# Altium PCB Holder_PCB.PcbDoc
Units mil, origin at the board's own origin, x right, y up, seen from the top; angles counter-clockwise.
Board outline 2244.09 x 2244.09 mil, 2 copper layers (Top Layer, Bottom Layer); 17 components, 13 nets, 72 pads, 0 vias.
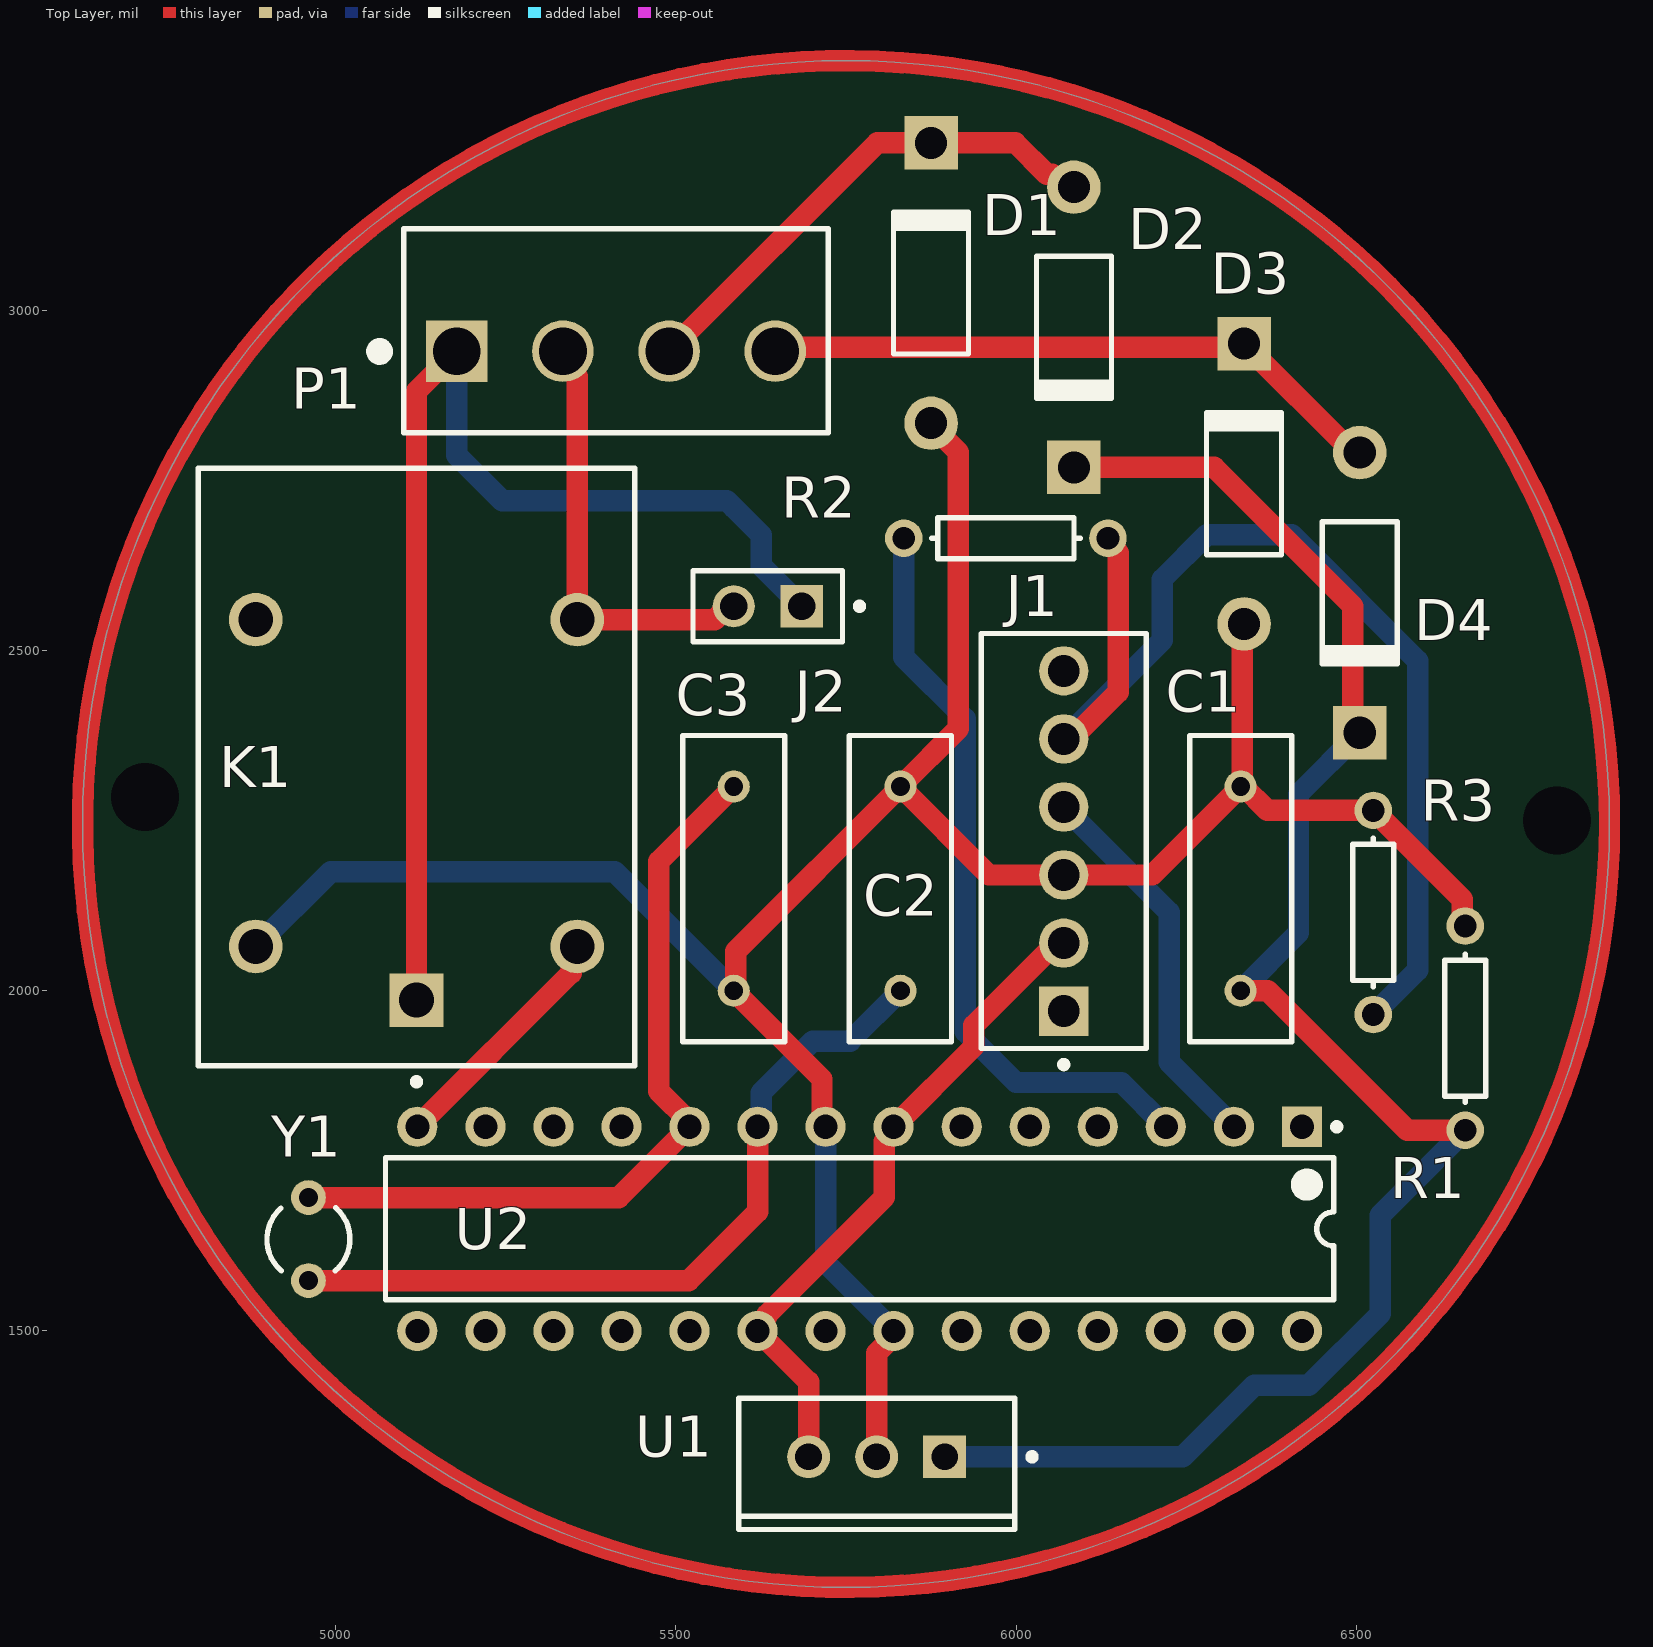
[diagram p0: Top Layer view]
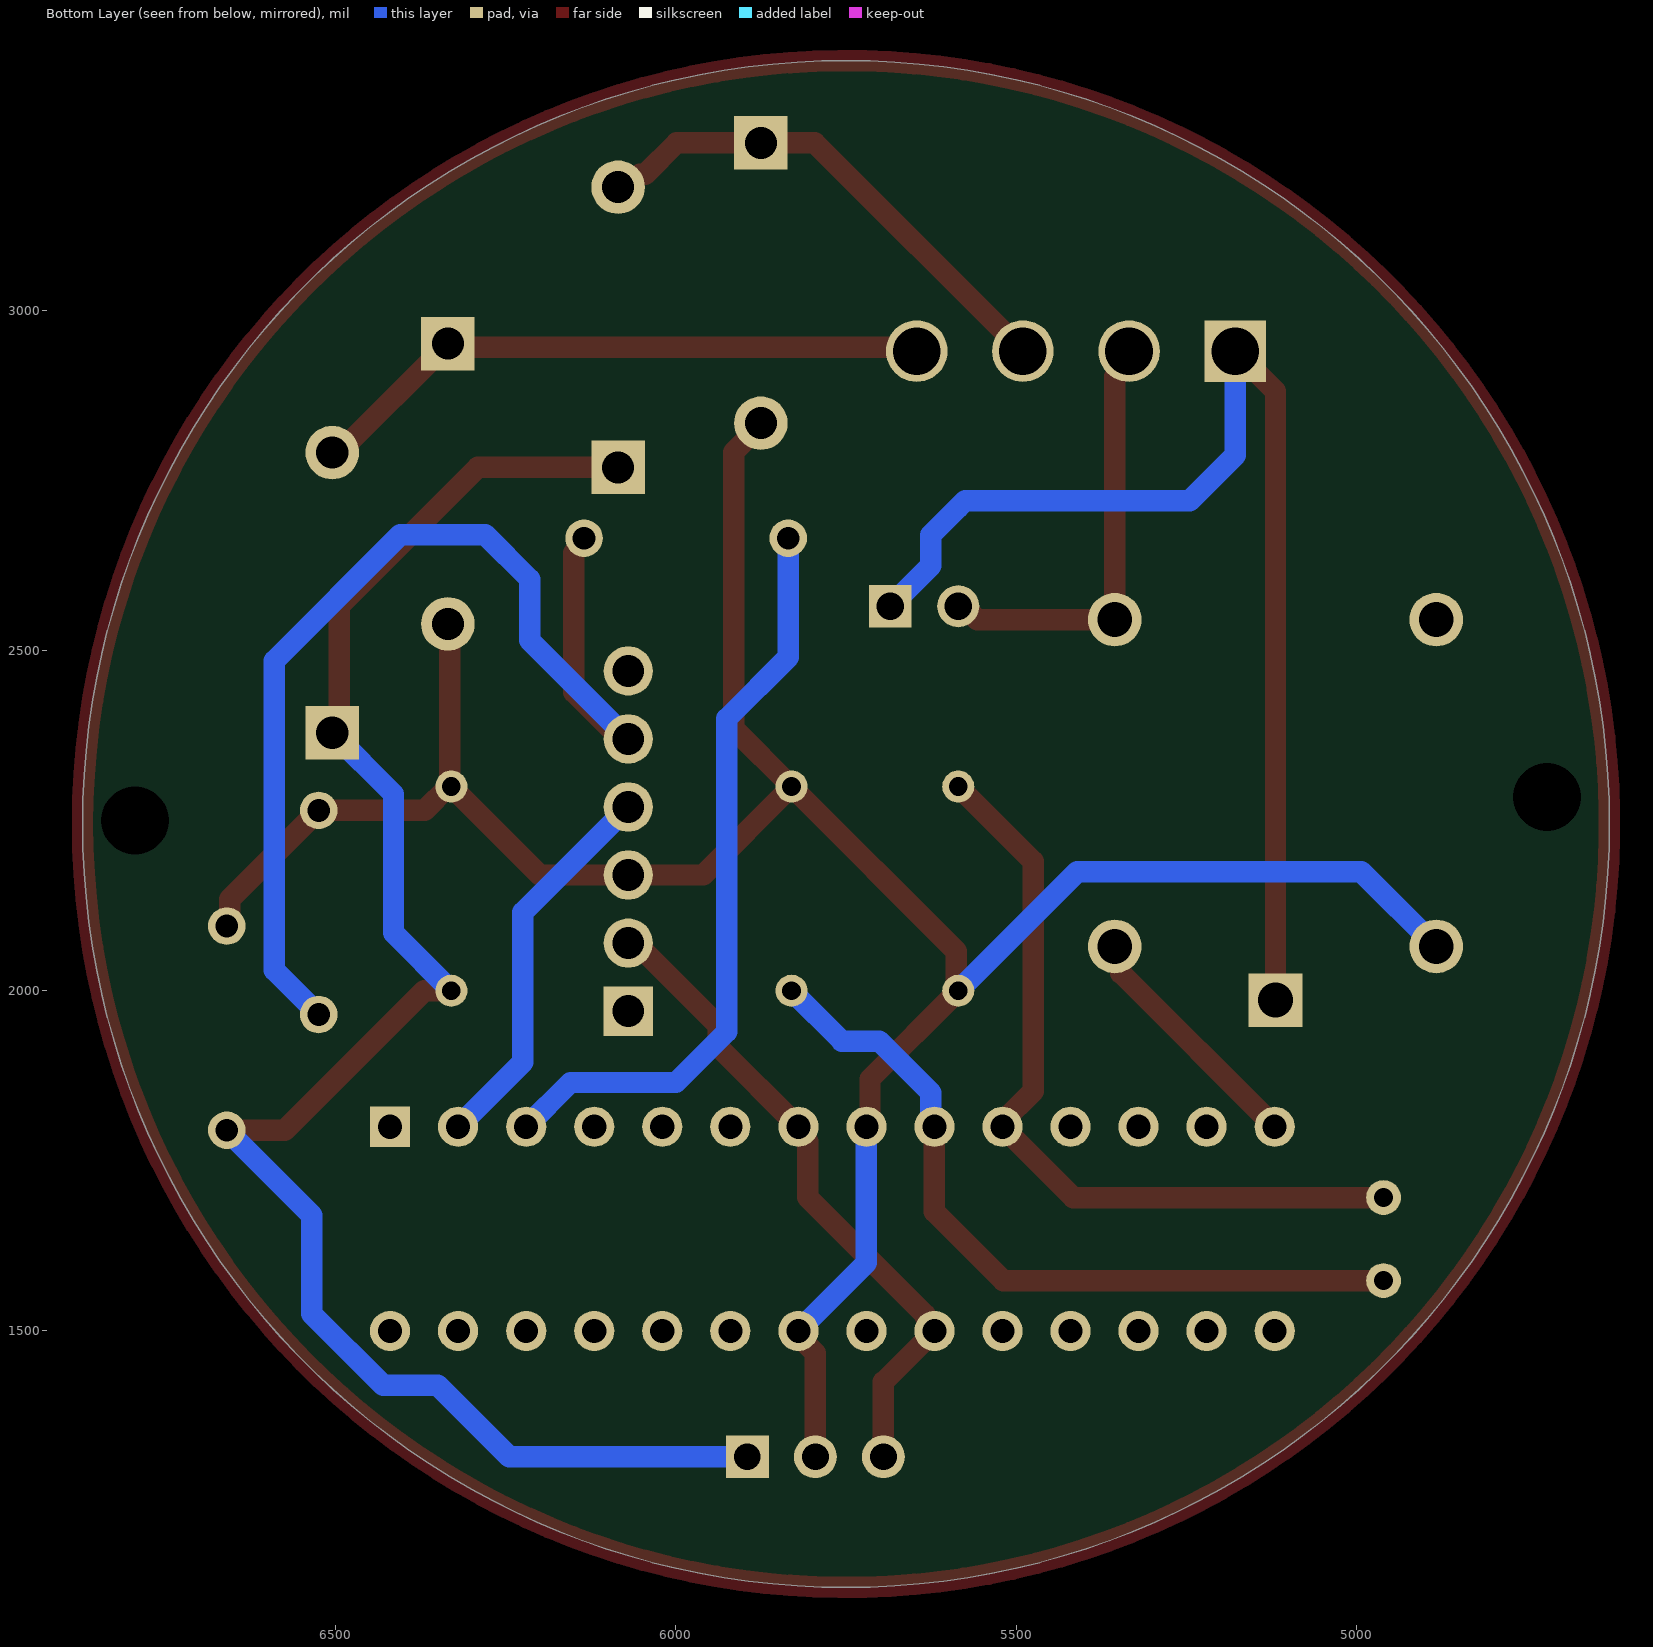
[diagram p1: Bottom Layer view, seen from below]

## Layer stack, top to bottom
Top Solder: solder mask 0.4, Solder Resist, Dk 3.5
Top Layer: signal copper 1.4
Dielectric 1: dielectric 12.6, FR-4, Dk 4.8
Bottom Layer: signal copper 1.4
Bottom Solder: solder mask 0.4, Solder Resist, Dk 3.5

## Board outline
4627.95,2245 ccw(c5750,2245) 5750,1122.95 ccw(c5750,2245) 6872.05,2245 ccw(c5750,2245) 5750,3367.05 ccw(c5750,2245)

## Design rules (kind name [scope] priority, off if disabled: settings)
Clearance [All] p1: gap=10 ignorepadtopadclearanceinfootprint=FALSE except(0: Arc-Hole Track-Hole SMDPad-Hole THPad-Hole Via-Hole Fill-Hole Poly-Hole Region-Hole Text-Hole; 11.81: Arc-Arc Arc-Track Arc-SMDPad Arc-THPad Track-Track Track-SMDPad Track-THPad SMDPad-SMDPad SMDPad-THPad)
PolygonConnect [All] p1: connectstyle=Relief reliefconductorwidth=10 reliefentries=4 polygonreliefangle="90 Angle" airgapwidth=10
RoutingVias [All] p1: holewidth=28 width=50 viastyle="Through Hole" minholewidth=28 minwidth=50 maxholewidth=28 maxwidth=50
SilkToSolderMaskClearance [IsPad] p1: minsilkscreentomaskgap=9 clearancetoexposedcopper=TRUE
SolderMaskExpansion [All] p1: expansion=4 istentingtop=FALSE
Width [All] p1: maxlimit=31.5 minlimit=31.5 preferedwidth=31.5 minimp=50.000000 maximp=50.000000 favimp=50.000000
29 further rules are at their usual default settings.

## Components (designator, comment, footprint, x,y, rotation, side; value= is the part's Value field where it differs from the comment)
C1 "Cap" RAD-0.3 6330,2150 r270 top value=100pF
C2 "Cap" RAD-0.3 5830,2150 r270 top value=22pF
C3 "Cap" RAD-0.3 5585,2150 r90 top value=22pF
D1 "Diode 1N4001" DO-41 5875,3040 r90 top
D2 "Diode 1N4001" DO-41 6085,2975 r270 top
D3 "Diode 1N4001" DO-41 6335,2745 r90 top
D4 "Diode 1N4001" DO-41 6505,2585 r270 top
J1 "22-27-2061" FP-22-27-2061-MFG 6070,2220 r90 top
J2 "M20-9990246" FP-M20-9990246-MFG 5635,2565 r180 top
K1 "JS1-5V-F" FP-JS1-5V-F-MFG 5118.78,2328.78 r90 top
P1 "640445-4" TECO-640445-4_V 5412,2940 r0 top
R1 "Res1" AXIAL-0.3 6660,1945 r270 top value=1K
R2 "Res1" AXIAL-0.3 5985,2665 r0 top value=1K
R3 "Res1" AXIAL-0.3 6525,2115 r90 top value=1K
U1 "MC7805CTG" ONSC-TO-220-3-221AB-01 5795,1315 r270 top
U2 "ATmega328-PU" 28P3 5770,1650 r270 top
Y1 "XTAL" R38 4960,1635 r0 top

## Footprints (in the part's own frame and the unit in brackets; to place one, negate y for a bottom-side part, rotate by r counter-clockwise, add the part's x,y. Pads: shape width x height; smd on the part's side, far side on the other; paste and mask are expansions set on the pad)
28P3 [mm] "28-Pin Plastic Dual In-Line Package (PDIP)"
  rect 1.5x1.5 hole 0.9: 1(-3.81,16.51)
  round 1.5 hole 0.9: 2(-3.81,13.97) 3(-3.81,11.43) 4(-3.81,8.89) 5(-3.81,6.35) 6(-3.81,3.81) 7(-3.81,1.27) 8(-3.81,-1.27) 9(-3.81,-3.81) 10(-3.81,-6.35) 11(-3.81,-8.89) 12(-3.81,-11.43) 13(-3.81,-13.97) 14(-3.81,-16.51) 15(3.81,-16.51) 16(3.81,-13.97) 17(3.81,-11.43) 18(3.81,-8.89) 19(3.81,-6.35) 20(3.81,-3.81) 21(3.81,-1.27) 22(3.81,1.27) 23(3.81,3.81) 24(3.81,6.35) 25(3.81,8.89) 26(3.81,11.43) 27(3.81,13.97) 28(3.81,16.51)
  silkscreen extent -3.93,-17.7 2.65,17.94, body extent -3.6,-17.65 3.6,17.65, height 4.58
AXIAL-0.3 [mm] "Axial Device, Thru-Hole; 2 Leads; 0.3 in Pin Spacing"
  round 1.4 hole 0.85: 1(-3.81,0) 2(3.81,0)
  silkscreen extent -2.77,-0.76 2.77,0.76
DO-41 [mm] "Diode, Axial; Body 5.2 x 2.7 mm (LxDia. max), Lead Dia. 0.86 mm (max)"
  round 2 hole 1.2: 1(-5.23,0)
  rect 2x2 hole 1.2: 2(5.23,0)
  silkscreen extent -2.65,-1.4 2.75,1.4
FP-22-27-2061-MFG [mm]
  rect 1.84x1.84 hole 1.19 paste-1000 mask+0: 1(-6.35,0)
  round 1.84 hole 1.19 paste-1000 mask+0: 2(-3.81,0) 3(-1.27,0) 4(1.27,0) 5(3.81,0) 6(6.35,0)
  silkscreen extent -8.47,-3.08 7.75,3.08, body extent -7.85,-3.18 7.85,3.17, height 0.25
FP-JS1-5V-F-MFG [mm]
  rect 2x2 hole 1.3 paste-1000 mask+0: 1(-8.7,0)
  round 2 hole 1.3 paste-1000 mask+0: 2(-6.7,-6) 3(5.5,-6) 4(5.5,6) 5(-6.7,6)
  silkscreen extent -11.87,-8.15 11.15,8.15, body extent -11.25,-8.25 11.25,8.25, height 0.25
FP-M20-9990246-MFG [mm]
  rect 1.57x1.57 hole 1.02 paste-1000 mask+0: 1(-1.27,0)
  round 1.57 hole 1.02 paste-1000 mask+0: 2(1.27,0)
  silkscreen extent -3.55,-1.32 2.79,1.32, body extent -2.89,-1.42 2.89,1.42, height 0.25
ONSC-TO-220-3-221AB-01 [mm] "FM, 3-Leads, Body 10.3x4.85mm, Pitch 2.54mm"
  rect 1.6x1.6 hole 1: 1(0,2.54)
  round 1.6 hole 1: 2(0,0) 3(0,-2.54)
  silkscreen extent -2.18,-5.15 2.72,5.93, body extent -2.16,-5.15 2.69,5.15, height 19.68
R38 [mm] "Crystal, Thru-Hole; 2 Leads; Body 3.1 x 8.2 mm (Dia.xH)"
  round 1.3 hole 0.7: 1(0,1.55) 2(0,-1.55)
  silkscreen extent -1.55,-1.19 1.55,1.17
RAD-0.3 [mm] "Radial Cap, Thru-Hole; 2 Leads; 0.3 in Pin Spacing"
  round 1.2 hole 0.7: 1(-3.81,0) 2(3.81,0)
  silkscreen extent -5.71,-1.91 5.71,1.91
TECO-640445-4_V [mil] "CONN, 4-Leads, Body 7.62x15.85mm, Pitch 3.962mm"
  rect 90.55x90.55 hole 70: 1(-234,0)
  round 90.55 hole 70: 2(-78,0) 3(78,0) 4(234,0)
  silkscreen extent -357,-120 312,180, body extent -312,-120 312,180, height 518

## Part data
C1 C2 C3: "Capacitor", LatestRevisionDate=17-Jul-2002, LatestRevisionNote="Re-released for DXP Platform.", PackageDescription="Radial Cap, Thru-Hole; 2 Leads; 0.3 in Pin Spacing", PackageReference=RAD-0.3, Published=8-Jun-2000, Publisher="Altium Limited"
D1 D2 D3 D4: "1 Amp General Purpose Rectifier", Code_JEDEC=DO-204-AL, ComponentLink1Description="Manufacturer Link", ComponentLink1URL=http://www.fairchildsemi.com/, ComponentLink2Description=Datasheet, ComponentLink2URL=http://www.fairchildsemi.com/ds/1N%2F1N4001.pdf, DatasheetVersion=1998, LatestRevisionDate=17-Jul-2002, LatestRevisionNote="Re-released for DXP Platform.", PackageDescription="Diode, Axial; Body 5.2 x 2.7 mm (LxDia. max), Lead Dia. 0.86 mm (max)", PackageReference=DO-41, PackageVersion=Aug-1999, Published=8-Jun-2000, Publisher="Altium Limited"
J1: library part CMP-04776-000309-1, "CONN HEADER VERT 6POS 2.54MM", Color=Natural, Contact Resistance=10mR, Current Rating=4A, Flammability Rating="UL94 V-0", Housing Color=White, Max Operating Temperature=75°C, Max Voltage Rating (AC)=250V, Min Operating Temperature=0°C, Package Quantity=10000, Connector Type="Male Pin", Contact Material=Brass, Contact Mating Length=0.295inch, Contact Plating=Tin, Contact Type="Male Pin", Depth=5.8mm, Fastening Type=Friction, Gender=Male, Hole Diameter=1.02mm, Housing Material=Nylon, Lead Pitch=2.54mm, Length=15.24mm, Material=Nylon, Max Current Rating=4A, Mount="Through Hole", Number of Contacts=6, Number of Positions=6, Number of Rows=1, Orientation=Straight, Packaging=Bulk, Pitch=2.54mm, Radiation Hardening=No, REACH SVHC="No SVHC", Series=KK, Termination=Solder, Voltage Rating=250V, Voltage Rating (AC)=250V, Working Voltage=250V
J2: library part CMP-15831-000009-1, "CONN HEADER VERT 2POS 2.54MM", Current Rating=3A, Manufacturer=Harwin, Temperature="-40°C to +105°C", Temperature Range High=+105°C, Temperature Range Low=-40°C, Automotive=No, Category=Conn, ComponentLink2Description=Datasheet, ComponentLink2URL=https://cdn.harwin.com/pdfs/M20-999.pdf, Conn Gender=Male, Conn Orientation=Vertical, Contact Material=Tin,Nickel, Device Class L1=Connectors, Device Class L2="Headers and Wire Housings", Device Class L3=unset, Digikey Description="CONN HEADER VERT 2POS 2.54MM", Height=8.99mm, Lead Free=Yes, Manufacturer Part Number=M20-9990246, Mouser Description="2.54mm (0.1\") Pitch SIL Vertical PC Tail Pin Header, 6.1mm mating pin height, tin, 2 contacts", Number of Contacts=2, Number of Rows=1, Octopart=https://octopart.com/m20-9990246-harwin-2590635, Package=M20-9990246, Pitch=2.54mm, RoHS=TRUE
K1: library part CMP-05606-000016-1, "RELAY GEN PURPOSE SPDT 10A 5V", Ambient Temperature Range High=+70°C, Ambient Temperature Range Low=-40°C, Coil Current=72mA, Coil Power=360mW, Coil Resistance=69.4Ω, Coil Voltage=5V, Manufacturer=Panasonic, Switching Current=10A, Switching Power=150W, Temperature="-40°C to +70°C", Automotive=No, Category=Relay, Coil Type=Non-Latching, ComponentLink2Description=Datasheet, ComponentLink2URL=https://www3.panasonic.biz/ac/e_download/control/relay/power/catalog/mech_eng_js.pdf?via=ok, Device Class L1=Electromechanical, Device Class L2=Relays, Device Class L3="Power Relays", Digikey Description="RELAY GEN PURPOSE SPDT 10A 5V", Height=16.8mm, Lead Free=Yes, Manufacturer Part Number=JS1-5V-F, Mouser Description="JS Series 10 A SPDT 5 V Through Hole Sealed Miniature Non-Polarized Power Relay", Number of Contacts=1, Octopart=https://octopart.com/js1-5v-f-panasonic-39428621, Package=JS1-5V-F, RoHS=TRUE, Standoff Height=0.3mm, Temperature Range High=+70°C, Temperature Range Low=-40°C, Throw Configuration=SPDT
P1: library part CMP-1684-00016-1, "Male Header, Pitch 3.962 mm, 1 x 4 Postion, Height 13.716 mm, Tail Length 3.175 mm, -55 to 105 degC, RoHS", Color=White, Current, Rating="7 /  / A", Flammability Rating=UL94V-0, Manufacturer="TE Connectivity", Package Description="Male Header, Pitch 3.962 mm, 1 x 4 Postion, Height 13.716 mm, Tail Length 3.175 mm", Package Reference=THD, Temperature, Operating="-55to+105 /  / °C", Voltage, Rating="600 /  / V", Agency Approvals=CSA,UL, Angle=Straight, Application=Forwire-to-board, Brand/Series=MTA-156Series, Color, Housing=White, Connector Type=Male, Contact Centerline Spacing="0.156 /  / in.", Contact Plating=Tin, Datasheet URL=http://www.te.com/commerce/DocumentDelivery/DDEController?Action=showdoc&DocId=Customer+Drawing%7F640445%7FAD5%7Fpdf%7FEnglish%7FENG_CD_640445_AD5.pdf%7F640445-4, Datasheet Version="Rev. AD5", Diameter, Insulation="0.095\"(SingleWire),0.07\"(MassTerminationWires)", Length, Overall="0.624 /  / \"", Length, Pin="0.125 /  / \"", Length, Terminal Post="0.125 /  / in.", Manufacturer URL=http://www.te.com, Material, Contact=CopperAlloy, Material, Housing=ThermoplasticPolyester, Mount Angle=Vertical, Mounting Hole Size="0.07 /  / \"", Mounting Type=PCBMount, Number of Contacts=4, Number of Positions=4, Number of Rows=1, Pin Spacing="0.156 /  / \"", Primary Type=InterconnectSystem, Special Features=IDC,Pinstrip, Standards=UL94V-0HousingFlammabilityRating,RoHSCompliant,ELVCompliant, Termination=Solder, Type=PCBPlug, Wire, AWG=26-18
R1 R2 R3: "Resistor", LatestRevisionDate=17-Jul-2002, LatestRevisionNote="Re-released for DXP Platform.", PackageDescription="Axial Device, Thru-Hole; 2 Leads; 0.3 in Pin Spacing", PackageReference=AXIAL-0.3, Published=8-Jun-2000, Publisher="Altium Limited"
U1: library part CMP-2000-04928-1, "Positive Voltage Regulator, 1 A, 5 V, 0 to 125 degC, 3-Pin TO-220, RoHS, Tube", Current, Output, Maximum=1A, Current, Quiescent Supply=6.5mA, Current, Supply=3.2mA, Dropout Voltage=2V, Manufacturer="ON Semiconductor", Package Description="3-Pin Flange Mount, Vertical Straight Lead, Body 9.97 x 4.445 mm, Pitch 2.54 mm", Package Reference=TO-220-3-221AB-01, Package Type=TO-220, Package Version="Rev. A, 11/2010", Resistance, Thermal, Junction to Case=5degC/W, Temperature, Operating, Maximum=+125degC, Temperature, Operating, Minimum=0degC, Temperature, Operating, Range=0to+125degC, Voltage, Input Range=Maximumof35V, Voltage, Input, High Level=35V, Voltage, Noise=10μV/V, Voltage, Output=5V, Datasheet URL=http://www.onsemi.com/pub_link/Collateral/MC7800-D.PDF, Datasheet Version="Rev. 27, 11/2014", Dimensions=10.28x4.82x15.75mm, Dropout Voltage Measurement Current=1A, Height=15.75mm, Length=10.28mm, Line Regulation=20mV, Load Regulation=25mV, Manufacturer URL=http://www.onsemi.com/, Mounting Type=ThroughHole, Number of Outputs=1, Number of Pins=3, Output Type=Fixed, Polarity=Positive, Regulation, Line=0.5mV, Regulation, Load=1.3mV, Regulator Function=Standard, Regulator Type=PositiveVoltageOut, Type=VoltageRegulator, Voltage, Dropout=2V, Voltage, Supply=35V, Width=4.82mm
U2: library part CMP-0095-00015-2, "8-bit AVR Microcontroller, 32KB Flash, 1KB EEPROM, 2KB SRAM, 28-pin PDIP, Industrial Grade (-40°C to 85°C)", ComponentLink1Description="Manufacturer URL", ComponentLink1URL=http://www.atmel.com/, ComponentLink2Description="ATmega48A/48PA/88A/88PA/168A/168PA/328/328P Datasheet", ComponentLink2URL=http://www.atmel.com/dyn/resources/prod_documents/8271.pdf, ComponentLink3Description="ATmega48A/48PA/88A/88PA/168A/168PA/328/328P Summary", ComponentLink3URL=http://www.atmel.com/dyn/resources/prod_documents/8271S.pdf, DatasheetVersion="revD, May-2011", PackageDescription="28-lead (0.300\"/7.62mm Wide) Plastic Dual Inline Package (PDIP)", PackageReference=28P3, PackageVersion="revB, Sep-2001", RevisionNote="DatasheetVersion updated. URLs added."
Y1: "Crystal Oscillator", LatestRevisionDate=17-Jul-2002, LatestRevisionNote="Re-released for DXP Platform.", PackageDescription="Crystal, Thru-Hole; 2 Leads; Body 3.1 x 8.2 mm (Dia.xH)", PackageReference=R38, Published=8-Jun-2000, Publisher="Altium Limited"

## Free pads (board coordinates)
  round 60 hole 100: 4(4720,2285) 5(6795,2250)

## Nets (pads, with @x,y where several pads share a name; then routed paths per layer and width w, separated by ;. In a path a pad name is that pad's centre, name@x,y a point inside that pad or via, vN(x,y) a via of type N, cw(c..) or ccw(c..) an arc to the next point about the centre after c; other vN are vias at no path point)
GND: C1.1 C2.1 C3.1 D1.1 D3.1 J1.3 K1.5 R1.1 R3.2 U1.2 U2.8 U2.22 | length 3884.8
  Top Layer w31.5: U2.8 5714.73,1805.27 5714.73,1870.27 C3.1 5588.01,2003.01 5588.01,2058.01 C2.1 ; U1.2 5795,1467.54 5820,1492.54 U2.22 ; D1.1 5875,2831.6 5915,2791.6 5915,2385 C2.1 ; D3.1 6332.5,2536.59 6332.5,2302.5 C1.1 ; R1.1 6655.48,2099.52 6655.48,2134.52 R3.2 6369.26,2265 6334.26,2300 C1.1 ; C2.1 5960,2170 J1.3 6200,2170 C1.1
  Bottom Layer w31.5: K1.5 4992.56,2175 5410,2175 C3.1 ; U2.8 5720,1600 U2.22
NetC1_2: C1.2 D2.2 D4.2 R1.2 U1.1 | length 2599.8
  Top Layer w31.5: D2.2 6290.91,2769.09 6495,2565 6495,2389.09 D4.2 ; C1.2 6370,2000 6575,1795 R1.2
  Bottom Layer w31.5: U1.1 6245,1315 6350,1420 6430,1420 6535,1525 6535,1670 R1.2 ; C1.2 6415,2085 6415,2289.09 D4.2
NetC2_2: C2.2 U2.9 Y1.2 | length 1146
  Top Layer w31.5: Y1.2 5518.98,1573.98 5620,1675 U2.9
  Bottom Layer w31.5: U2.9 5625.27,1805.27 5625.27,1850.27 5700.99,1925.99 5755.99,1925.99 C2.2
NetC3_2: C3.2 U2.10 Y1.1 | length 1167.3
  Top Layer w31.5: Y1.1 5416.02,1696.02 U2.10 5520,1807.46 5475,1852.46 5475,2190 C3.2
NetD1_2: D1.2 D2.1 P1.3 | length 748.6
  Top Layer w31.5: P1.3 5795.91,3245.91 D1.2 5999.09,3245.91 6045,3200 6053.12,3200 6072.22,3180.91 D2.1
NetD3_2: D3.2 D4.1 P1.4 | length 929.8
  Top Layer w31.5: P1.4 5651.45,2945.45 6329.55,2945.45 D3.2 6495,2790.91 D4.1
NetJ1_2: J1.2 U1.3 U2.7 U2.20 | length 979.1
  Top Layer w31.5: U1.3 5695,1425 U2.20 5620,1507.46 5633.78,1521.24 5633.78,1523.78 5806.22,1696.22 5806.22,1778.76 5820,1792.54 U2.7 5938.01,1918.01 5938.01,1949.43 6050.75,2062.17 6062.17,2062.17 J1.2
NetJ1_4: J1.4 U2.2 | length 573.6
  Bottom Layer w31.5: J1.4 6225,2115 6225,1895 U2.2
NetJ1_5: J1.5 R2.2 R3.1 | length 1661.4
  Top Layer w31.5: J1.5 6081.08,2370 6150,2438.92 6150,2643.61 6135,2658.61 R2.2
  Bottom Layer w31.5: J1.5 6215,2515 6215,2605 6280,2670 6405,2670 6590,2485 6590,2030 R3.1
NetJ2_1: J2.1 K1.1 P1.1 | length 1756.6
  Top Layer w31.5: K1.1 5118.78,2880.78 P1.1
  Bottom Layer w31.5: P1.1 5178,2787 5245,2720 5575,2720 5584.98,2710.02 5625.3,2669.7 5625.3,2624.7 J2.1
NetJ2_2: J2.2 K1.3 P1.2 | length 641.5
  Top Layer w31.5: P1.2 5334,2924.02 5355,2903.02 K1.3 5557.11,2545.31 5576.8,2565 J2.2
NetK1_2: K1.2 U2.14 | length 362.3
  Top Layer w31.5: U2.14 5345.96,2025.96 5345.96,2055.96 K1.2
NetR2_1: R2.1 U2.3 | length 1115.3
  Bottom Layer w31.5: R2.1 5835,2490 5925,2400 5925,1940 5999.86,1865.14 6154.86,1865.14 U2.3
pads on no net: J1.1 J1.6 K1.4 U2.1 U2.4 U2.5 U2.6 U2.11 U2.12 U2.13 U2.15 U2.16 U2.17 U2.18 U2.19 U2.21 U2.23 U2.24 U2.25 U2.26 U2.27 U2.28
copper on no net: | length 7050
  Top Layer w31.5: 6872.05,2245 ccw(c5750,2245) 6872.05,2245